# EAGLE board simreader_marble_hammi_FT230X (EAGLE 6.6.0)
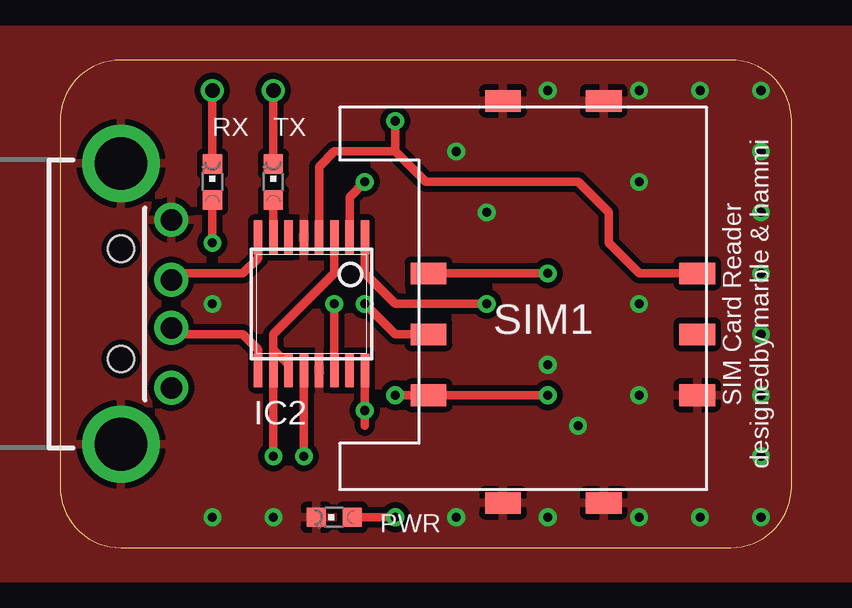
[diagram p0: board, top side]
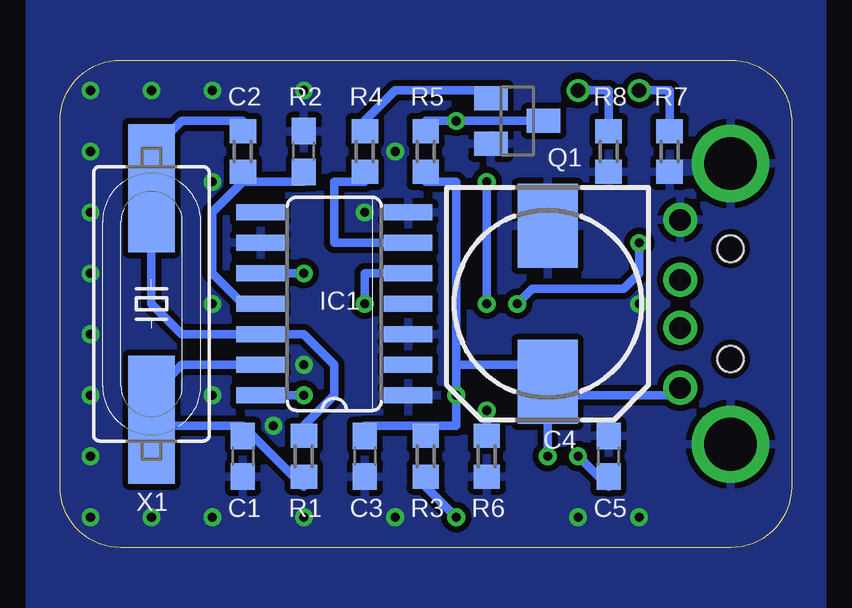
[diagram p1: board, bottom side, seen from below]

Size 30.48 x 20.32 mm. Coordinates in mm from the lower left corner, seen from the top.
Outline: 0,17.78 0,2.54 arc90 2.54,0 27.94,0 arc90 30.48,2.54 30.48,17.78 arc90 27.94,20.32 2.54,20.32 arc90 0,17.78
Copper layers (1*16): Top 0.035mm / dielectric 1.5mm / Bottom 0.035mm
Design rules "oshpark": minimum track width 6mil, minimum drill 13mil, track to track 6mil, track to pad 6mil, pad to pad 6mil, via to via 6mil, smd to smd 6mil, copper to edge 0mil, drill to drill 8mil, minimum pad ring 10mil, minimum via ring 7mil, stop-mask expansion 4mil, vias tented up to drill 100mil, thermal gap 10mil

## Footprints (pad centres in the part's own frame; a part is rotated, then mirrored left to right if it is on the bottom)
C0603 = smd 1.1 x 1: 1 -0.85,0; 2 0.85,0
140CLH-0810 = smd 3.5 x 2.5: + 3.25,0; - -3.25,0
SO14 = smd 0.66 x 2.032: 1 -3.81,-3.073; 2 -2.54,-3.073; 3 -1.27,-3.073; 4 0,-3.073; 5 1.27,-3.073; 6 2.54,-3.073; 7 3.81,-3.073; 8 3.81,3.073; 9 2.54,3.073; 10 1.27,3.073; 11 0,3.073; 12 -1.27,3.073; 13 -2.54,3.073; 14 -3.81,3.073
SSOP-16 = smd 0.35 x 1.4: 1 -2.223,-2.775; 2 -1.587,-2.775; 3 -0.953,-2.775; 4 -0.318,-2.775; 5 0.318,-2.775; 6 0.953,-2.775; 7 1.587,-2.775; 8 2.223,-2.775; 9 2.223,2.775; 10 1.587,2.775; 11 0.953,2.775; 12 0.318,2.775; 13 -0.318,2.775; 14 -0.953,2.775; 15 -1.587,2.775; 16 -2.223,2.775
USB-A-H = drill 0.9: D+ 2.1,1; D- 2.1,-1; GND 2.1,3.5; VBUS 2.1,-3.5 | drill 2.2: GND2 0,-5.85; GND3 0,5.85 | hole 1.1: 0,2.3; 0,-2.3
CHIPLED_0603 = smd 0.8 x 0.8: A 0,-0.75; C 0,0.75
SOT23-BEC = smd 1 x 1.4: B -0.95,-1.1; C 0,1.1; E 0.95,-1.1
R0603 = smd 1 x 1.1: 1 -0.85,0; 2 0.85,0
C707_10M006_136_2 = smd 1.49 x 0.9: 1 4.965,2.54; 2 4.965,0; 3 4.965,-2.54; 4 -6.235,2.54; 5 -6.235,0; 6 -6.235,-2.54; S1 -2.335,7.02; S2 1.865,7.02; S3 -2.335,-9.73; S4 1.865,-9.73
HC49UP = smd 5.334 x 1.93: 1 -4.826,0; 2 4.826,0

## Placement (x,y rotation side)
C1  20pF  [C0603]  22.86,3.81 270 bottom
C2  20pF  [C0603]  20.32,16.51 90 bottom
C3  1uF  [C0603]  17.78,3.81 270 bottom
C4  100uF  [140CLH-0810]  10.16,10.16 270 bottom
C5  100nF  [C0603]  7.62,3.81 90 bottom
IC1  74AC04D  [SO14]  19.05,10.16 90 bottom
IC2  FT230XS  [SSOP-16]  10.48,10.16 180 top
J1  USB-SHIELD-A-H  [USB-A-H]  2.54,10.16 0 top
PWR  [CHIPLED_0603]  11.43,1.27 90 top
Q1  BC808  [SOT23-BEC]  11.43,17.78 270 bottom
R1  1 Meg  [R0603]  20.32,3.81 90 bottom
R2  1K  [R0603]  22.86,16.51 90 bottom
R3  1K  [R0603]  15.24,3.81 270 bottom
R4  10K  [R0603]  17.78,16.51 270 bottom
R5  10K  [R0603]  15.24,16.51 270 bottom
R6  0  [R0603]  12.7,3.81 90 bottom
R7  1K  [R0603]  5.08,16.51 90 bottom
R8  1K  [R0603]  7.62,16.51 90 bottom
RX  [CHIPLED_0603]  6.35,15.24 0 top
SIM1  C707-10M006-136-2  [C707_10M006_136_2]  20.32,8.89 180 top
TX  [CHIPLED_0603]  8.89,15.24 0 top
X1  3.57 MHz  [HC49UP]  26.67,10.16 270 bottom

## Library data of the parts
C1-C5 R1-R8 = rcl
IC1 = 74xx-eu
IC2 = ftdichip
J1 = obddiag-net
PWR RX TX = led
Q1 = transistor
SIM1 = con-amphenol
X1 = crystal; OC_FARNELL: unknown; OC_NEWARK: unknown

## Nets
CLK: IC1.10 SIM1.3
GND: C1.2 C2.2 C3.2 C4.- C5.2 IC1.1 IC1.3 IC1.7 IC1.9 IC2.5 IC2.13 J1.GND J1.GND2 J1.GND3 PWR.C Q1.E R6.1 R7.1 R8.1 SIM1.4 SIM1.S1 SIM1.S2 SIM1.S3 SIM1.S4
IO/RX: IC2.4 Q1.C R5.1 SIM1.6
N$1: C1.1 IC1.13 R1.1 X1.2
N$2: IC1.12 R1.2 R2.2 X1.1
N$3: C2.1 IC1.11 R2.1
N$4: IC1.6 R4.2
N$6: Q1.B R4.1
N$13: PWR.A R3.2
N$26: IC2.9 J1.D-
N$27: IC2.8 J1.D+
N$28: C5.1 IC2.3 IC2.10 IC2.11
N$29: IC2.16 R6.2
N$30: IC2.14 RX.A
N$31: IC2.7 TX.A
N$32: R7.2 RX.C
N$33: R8.2 TX.C
RTS/RST: IC2.2 SIM1.2
TX: IC1.5 IC2.1
VCC: C3.1 C4.+ IC1.14 IC2.12 J1.VBUS R3.1 R5.2 SIM1.1

## Tracks (layer width: path | path; a pad name or v marks a point on that pad's centre or on a via)
CLK  (via drill 0.38)
  Top 0.356: v20.32,11.43 SIM1.3
  Bottom 0.356: IC1.10 v20.32,11.43
GND  (via drill 0.38)
  other vias: 20.32,7.62 21.59,5.08 24.13,6.35 24.13,15.24 24.13,10.16 6.35,1.27 29.21,1.27 29.21,19.05 20.32,1.27 20.32,19.05 24.13,1.27 24.13,19.05 16.51,1.27 26.67,19.05 29.21,16.51 29.21,13.97 29.21,11.43 29.21,8.89 29.21,6.35 29.21,3.81 26.67,1.27 16.51,16.51 17.78,13.97 6.35,10.16 8.89,1.27
  pour Top (isolate 0.254): -2.54,-1.27 33.02,-1.27 33.02,21.59 -2.54,21.59
  pour Bottom (isolate 0.254): -1.27,-2.54 31.75,-2.54 31.75,22.86 -1.27,22.86
IO/RX  (via drill 0.38)
  Top 0.356: SIM1.6 24.13,11.43 22.86,12.7 22.86,13.97 21.59,15.24 15.24,15.24 13.97,16.51 | IC2.4 10.79,15.88 11.43,16.51 13.97,16.51 | v13.97,17.78 13.97,16.51
  Bottom 0.356: Q1.C v13.97,17.78 15.24,17.78 R5.1
N$1
  Bottom 0.356: 22.86,5.08 26.67,5.08 X1.2 26.67,6.35 25.4,7.62 IC1.13 | R1.1 20.32,2.54 22.86,5.08 | 22.86,5.08 C1.1
N$2
  Bottom 0.356: R1.2 20.32,5.08 19.05,6.35 19.05,7.62 20.32,8.89 IC1.12 25.4,8.89 26.67,10.16 X1.1 26.67,16.51 25.4,17.78 22.86,17.78 R2.2
N$3
  Bottom 0.356: IC1.11 22.86,10.16 24.13,11.43 24.13,13.97 22.86,15.24 | C2.1 20.32,15.24 22.86,15.24 | R2.1 22.86,15.24
N$4
  Bottom 0.356: IC1.6 19.05,12.7 19.05,15.24 17.78,15.24 R4.2
N$6
  Bottom 0.356: R4.1 17.78,17.78 16.51,19.05 12.7,19.05 12.53,18.88 Q1.B
N$13  (via drill 0.38)
  Top 0.356: PWR.A v13.97,1.27
  Bottom 0.356: R3.2 15.24,2.54 v13.97,1.27
N$26
  Top 0.356: J1.D- 4.91,8.89 7.62,8.89 8.26,8.26 IC2.9
N$27
  Top 0.356: IC2.8 8.26,12.06 7.62,11.43 4.91,11.43 J1.D+
N$28  (via drill 0.38)
  Top 0.356: 8.89,8.26 IC2.10 v8.89,3.81 | IC2.11 9.53,7.62 8.89,8.26 | 8.89,8.26 8.89,8.89 11.43,11.43 IC2.3
  Bottom 0.356: v8.89,3.81 7.62,2.54 C5.1
N$29  (via drill 0.38)
  Top 0.356: IC2.16 v12.7,5.71 12.7,5.08
  Bottom 0.356: v12.7,5.71 R6.2
N$30  (via drill 0.38)
  Top 0.356: IC2.14 v11.43,10.16 | RX.A v6.35,12.7
  Bottom 0.356: v11.43,10.16 10.79,10.79 6.99,10.79 6.35,11.43 v6.35,12.7
N$31
  Top 0.356: TX.A IC2.7
N$32  (via drill 0.6)
  Top 0.356: v6.35,19.05 RX.C
  Bottom 0.356: R7.2 5.08,19.05 v6.35,19.05
N$33  (via drill 0.6)
  Top 0.356: v8.89,19.05 TX.C
  Bottom 0.356: R8.2 7.62,19.05 v8.89,19.05
RTS/RST  (via drill 0.38)
  Top 0.356: v12.7,10.16 13.97,8.89 SIM1.2 | IC2.2 12.06,14.61 v12.7,15.24
  Bottom 0.356: v12.7,15.24 v12.7,10.16
TX  (via drill 0.38)
  Top 0.356: v17.78,10.16 13.97,10.16 12.7,11.43 IC2.1
  Bottom 0.356: v17.78,10.16 17.78,11.43 IC1.5 15.24,11.43
VCC  (via drill 0.38)
  Top 0.356: v13.97,6.35 SIM1.1 v20.32,6.35 | IC2.12 v10.16,3.81
  Bottom 0.356: IC1.14 v20.32,6.35 | C3.1 17.78,5.08 15.24,5.08 | 15.24,5.08 R3.1 | C4.+ 10.16,7.62 13.97,7.62 | 15.24,5.08 13.97,5.08 v13.97,6.35 13.97,7.62 | 13.97,7.62 13.97,15.24 15.24,15.24 R5.2 | C4.+ 10.16,6.35 4.95,6.35 J1.VBUS | C4.+ v10.16,3.81

## Text on the board
tNames: SIM Card Reader / designedby marble & hammi